# Altium PCB Hall.PcbDoc
Units mm, origin at the board's own origin, x right, y up, seen from the top; angles counter-clockwise.
Board outline 31.95 x 23.94 mm, 2 copper layers (Top Layer, Bottom Layer); 15 components, 8 nets, 36 pads, 49 vias.
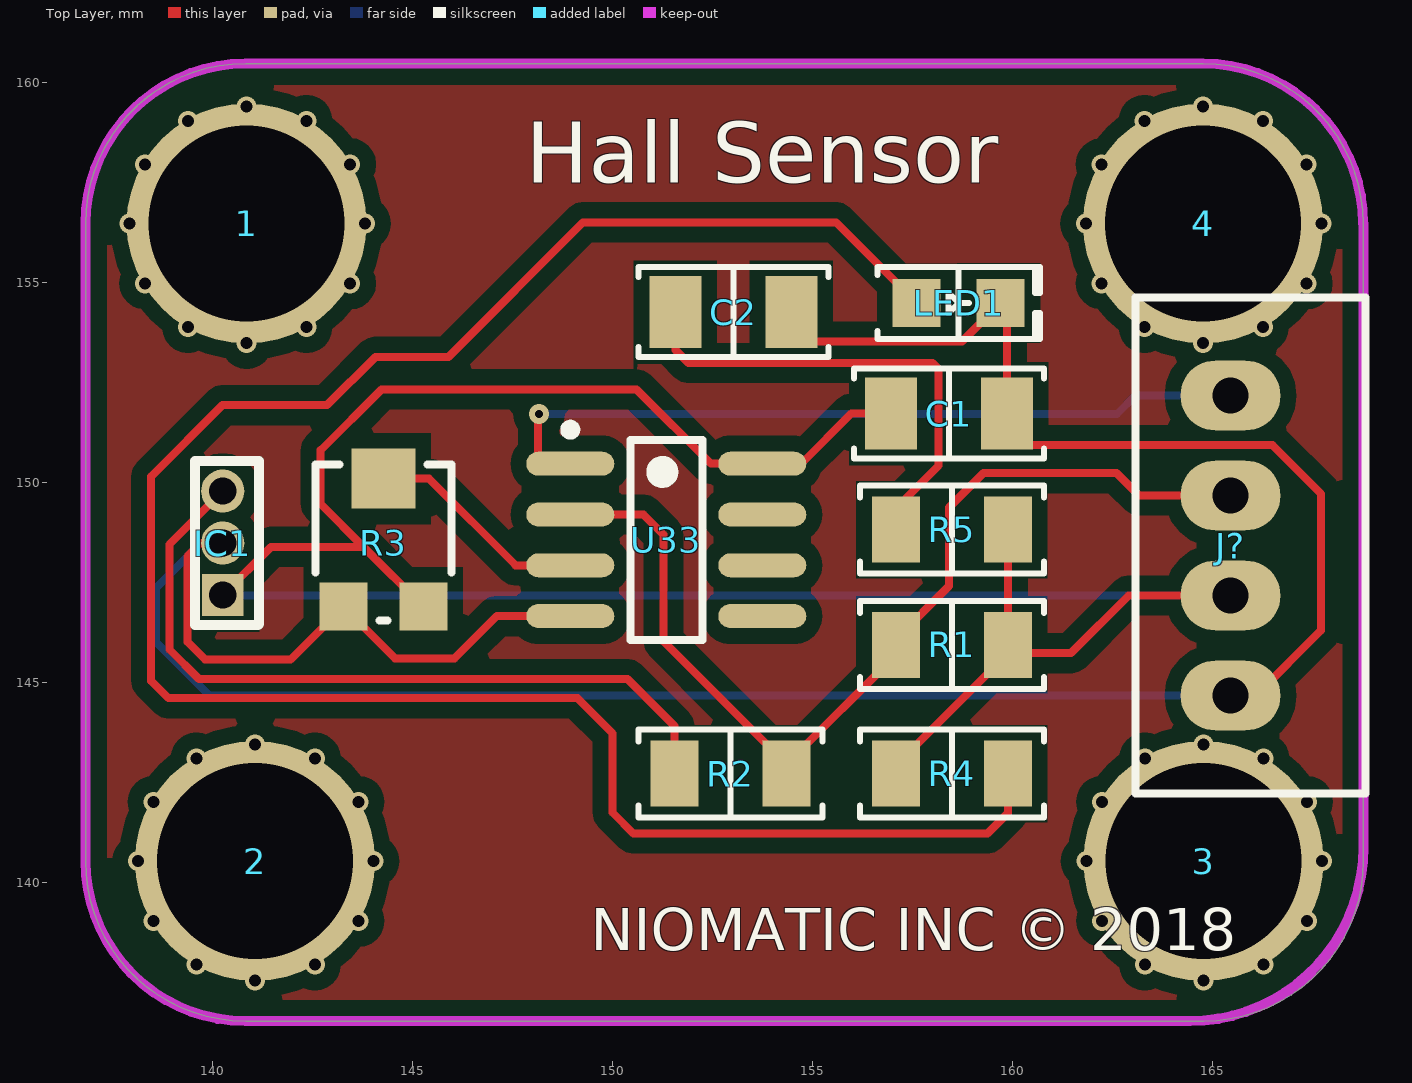
[diagram p0: Top Layer view]
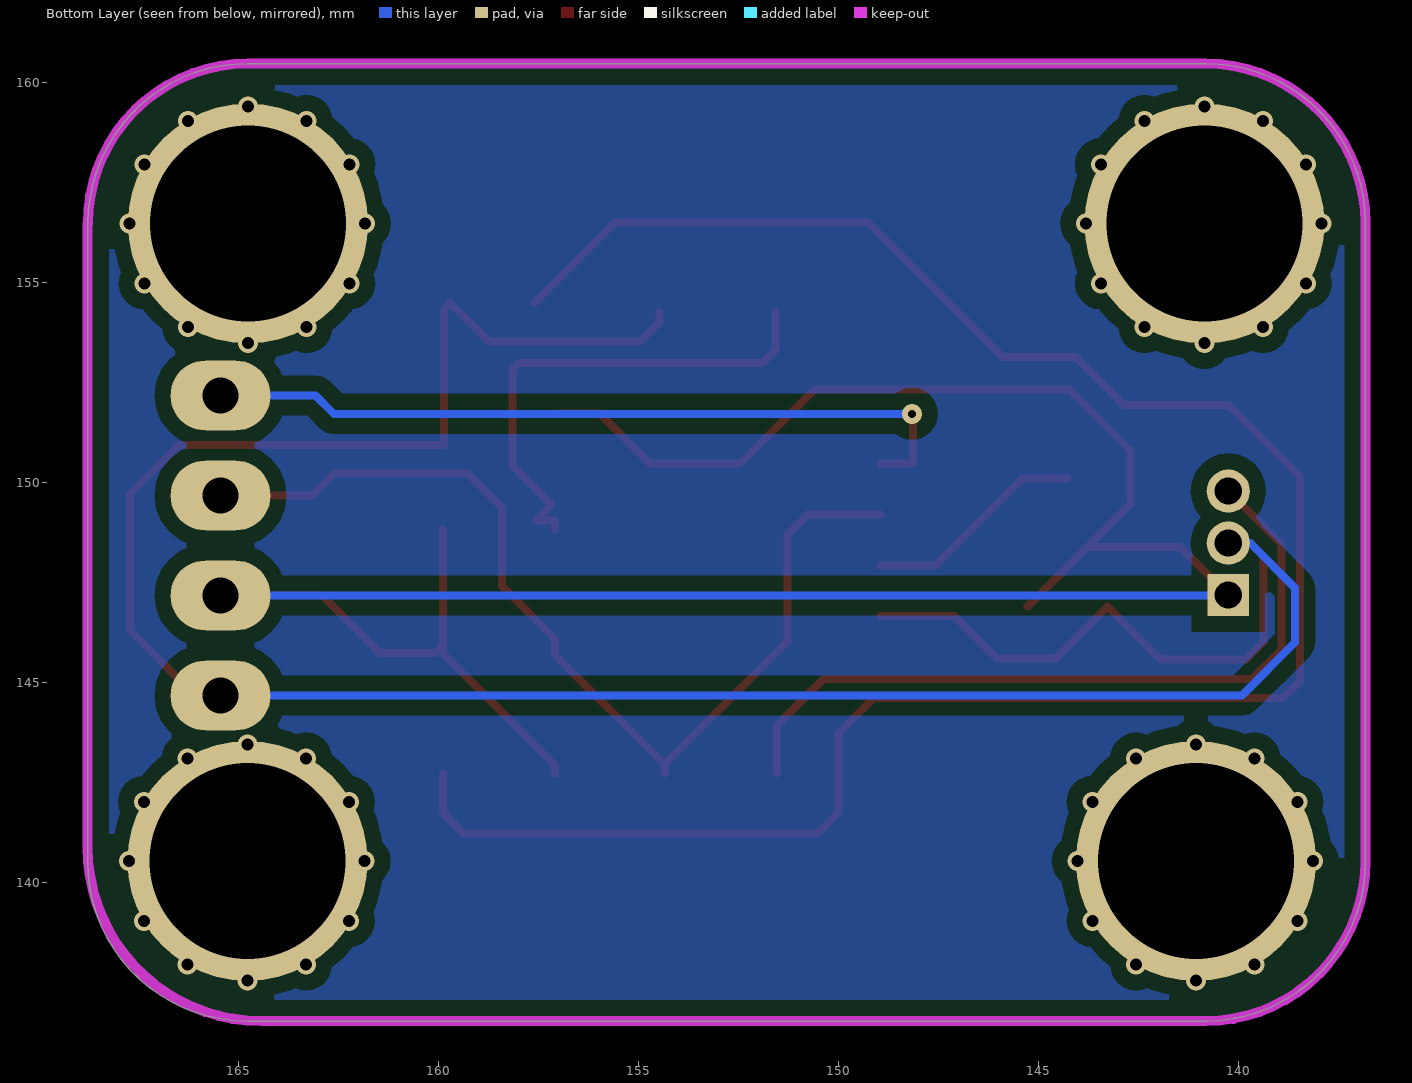
[diagram p1: Bottom Layer view, seen from below]
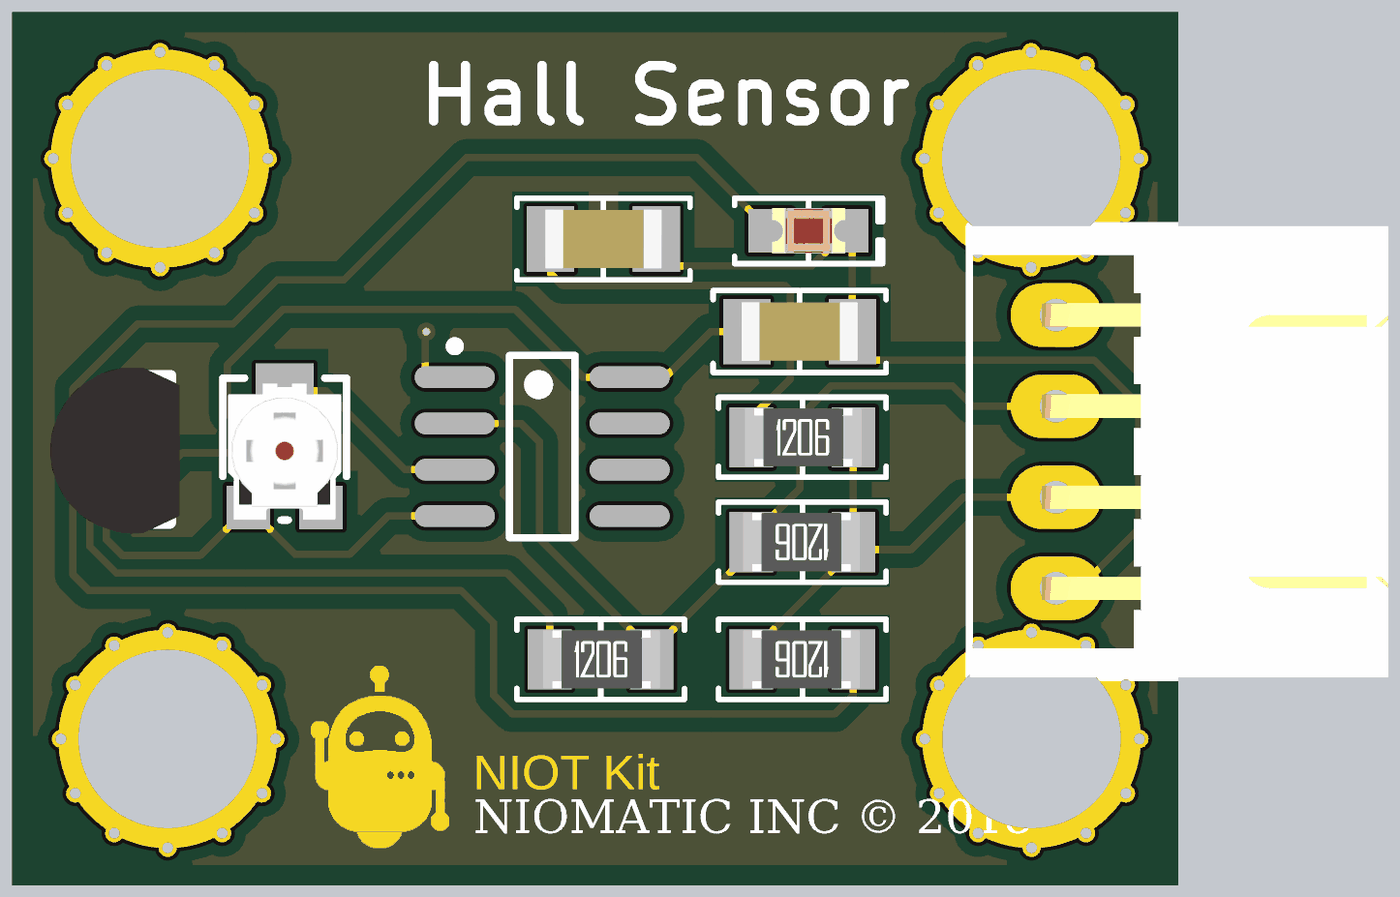
[diagram p2: 3D render of the assembled board from above, using the file's embedded part models]

## Layer stack, top to bottom
Top Solder: solder mask 0.0102, Solder Resist, Dk 3.5
Top Layer: signal copper 0.0356
Dielectric 1: dielectric 0.32, FR-4, Dk 4.8
Bottom Layer: signal copper 0.0356
Bottom Solder: solder mask 0.0102, Solder Resist, Dk 3.5

## Board outline
136.821,140.53 ccw(c140.821,140.53) 140.821,136.53 164.77,136.53 ccw(c164.77,140.53) 168.77,140.53 168.77,156.47 168.761,156.47 ccw(c164.761,156.47) 164.761,160.47 140.821,160.47 ccw(c140.821,156.47) 136.821,156.47 136.821,156.45

## Design rules (kind name [scope] priority, off if disabled: settings)
Clearance [All] p1: gap=0.4 ignorepadtopadclearanceinfootprint=FALSE
PolygonConnect [All] p1: connectstyle=Relief reliefconductorwidth=0.254 reliefentries=4 polygonreliefangle="90 Angle" airgapwidth=0.254
RoomDefinition Hall [InComponentClass('Hall')] p1: confinementstyle=ConfineIn formatcopy=TRUE lockcomponents=FALSE outline 178.943,26.924 198.247,26.924 198.247,44.577 178.943,44.577
RoutingVias [All] p1: holewidth=0.2 width=0.5 viastyle="Through Hole" minholewidth=0.2 minwidth=0.5 maxholewidth=0.2 maxwidth=0.5
SolderMaskExpansion [All] p1: expansion=0.102
Width [All] p1: maxlimit=0.2 minlimit=0.2 preferedwidth=0.2
30 further rules are at their usual default settings.

## Components (designator, comment, footprint, x,y, rotation, side; value= is the part's Value field where it differs from the comment)
1 "Lego" "Lego Hole" 140.85,156.47 r90 top
2 "Lego" "Lego Hole" 141.06,140.53 r90 top
3 "Lego" "Lego Hole" 164.771,140.53 r90 top
4 "Lego" "Lego Hole" 164.761,156.47 r90 top
C1 "100nF" "CAP 1206/3216" 158.405,151.719 r180 top value=0.1uF
C2 "100nF" "CAP 1206/3216" 153.02,154.258 r0 top value=0.1uF
IC1 "" SSe49 140.25,147.18 r90 top
J? "4 Pin" "JST XH B4B-XH-A - RIGHT" 165.445,148.42 r90 top
LED1 "RED" "LED 0805/2012 RED" 158.65,154.483 r0 top value=Green
R1 "100K" "RES 1206/3216" 158.48,145.936 r180 top value=1K
R2 "150R" "RES 1206/3216" 152.945,142.717 r0 top value=1K
R3 "10K" "POT Panasonic EVM" 144.27,148.44 r0 top value=10k
R4 "1K" "RES 1206/3216" 158.48,142.717 r180 top
R5 "10k" "RES 1206/3216" 158.48,148.815 r0 top value=1K
U33 "LM393M" M08A_N 151.34,148.56 r0 top

## Footprints (in the part's own frame and the unit in brackets; to place one, negate y for a bottom-side part, rotate by r counter-clockwise, add the part's x,y. Pads: shape width x height; smd on the part's side, far side on the other; paste and mask are expansions set on the pad)
"CAP 1206/3216" [mm] "Chip Capacitor, 2-Leads, Body 3.25x1.60mm, IPC Medium Density"
  rect 1.3x1.8 smd: 1(-1.45,0) 2(1.45,0)
  silkscreen extent -2.38,-1.12 2.37,1.12, body extent -1.6,-0.81 1.6,0.81, height 1.62
"JST XH B4B-XH-A - RIGHT" [mm]
  oval 1.75x2.5 hole 0.9: 1(-3.75,0) 2(-1.25,0) 3(1.25,0) 4(3.75,0)
  silkscreen extent -6.2,-3.38 6.2,2.38, body extent -6.2,-9.13 6.2,2.37, height 6.1
"LED 0805/2012 RED" [mm] "Chip Diode, 2-Leads, Body 2.00x1.25mm, IPC Medium Density"
  rect 1.2x1.2 smd: 1(-1.05,0) 2(1.05,0)
  silkscreen extent -2.03,-0.9 2.03,0.9, body extent -1,-0.62 1,0.63, height 0.9
"Lego Hole" [mm]
  round 6 hole 4.9: 0(0,0)
M08A_N [mm] "SOIC, 8-Leads, Body 4.9x3.9mm, Pitch 1.27mm, IPC Medium Density"
  oval 2.2x0.6 smd: 1(-2.4,1.905) 2(-2.4,0.635) 3(-2.4,-0.635) 4(-2.4,-1.905) 5(2.4,-1.905) 6(2.4,-0.635) 7(2.4,0.635) 8(2.4,1.905)
  silkscreen extent -2.52,-2.5 0.9,2.88, body extent -2,-2.5 2,2.5, height 1.75
"POT Panasonic EVM" [mm] "Panasonic EVM3Y 3.45mm x 3.10mm x 1.55mm"
  rect 1.2x1.2 smd: 1(-1,-1.55) 3(1,-1.55)
  rect 1.6x1.5 smd: 2(0,1.65)
  silkscreen extent -1.7,-1.9 1.7,2, body extent -1.55,-1.9 1.55,1.85, height 1.55
"RES 1206/3216" [mm] "Chip Resistor, 2-Leads, Body 3.13x1.55mm, IPC Medium Density"
  rect 1.2x1.65 smd: 1(-1.4,0) 2(1.4,0)
  silkscreen extent -2.3,-1.1 2.3,1.1, body extent -1.57,-0.8 1.62,0.8, height 0.6
SSe49 [mm]
  rect 1.046x1.046 / inner rect 1.524x1.524 / far side rect 1.046x1.046 hole 0.68: 1(0,0)
  round 1.08 / inner round 1.524 / far side round 1.08 hole 0.68: 2(1.3,0) 3(2.6,0)
  silkscreen extent -0.75,-0.91 3.35,0.69, body extent -1.02,-1.14 3.56,2.42, height 8.18

## Part data
C1 C2: library part Capacitor, "SMT Capacitor"
IC1: library part SS49E-T3, Manufacturer_Name=Honeywell, Package=TO130P160X410X300-3P, Allied_Number=70238630, DeviceSetName=SS49E-T3, GateName_1=G$1, Height=1.6mm, LibraryName=SS49E-T3, Manufacturer_Part_Number=SS49E-T3, RS_Part_Number=8749069, Supplier_Name=RS, SymbolName_1=SS49E-T3
LED1: library part LED, "Chip LED"
R1 R2 R4 R5: library part Resistor, "SMT Resistor"
R3: library part Potentiometer, "Potentiometer"
U33: "Low Power Low Offset Voltage Dual Comparator, 8-pin Narrow SOIC", Manufacturer="National Semiconductor", PackageTopMarking=NSZXTT*LM*393M, PowerWise=N, Code_IPC=SOIC127P600-8, Code_JEDEC=MS-012-AA, ComponentLink1Description="Manufacturer URL", ComponentLink1URL=http://www.national.com/, ComponentLink2Description="LM393 Datasheet", ComponentLink2URL=http://www.national.com/ds/LM/LM393.pdf, ComponentLink3Description="LM393 Web Page", ComponentLink3URL=http://www.national.com/pf/LM/LM393.html, ComponentLink4Description="M08A Package Page", ComponentLink4URL=http://www.national.com/packaging/folders/m08a.html, CompType=Amplifiers, DatasheetVersion=Aug-2002, High-Reliability=Y, PackageDescription="SOIC Narrow, 4.9 x 3.9 x 1.45mm, 8 Lead, 1.27mm Pitch", PackageReference=M08A, PackageVersion="revM, May-2009", PartNumber=LM393M, PinCount=8, RoHS=N

## Via types
v1: diameter 0.5, hole 0.3, Top Layer to Bottom Layer, 48 vias
v2: diameter 0.5, hole 0.2, Top Layer to Bottom Layer, tented both sides, 1 vias

## Nets (pads, with @x,y where several pads share a name; then routed paths per layer and width w, separated by ;. In a path a pad name is that pad's centre, name@x,y a point inside that pad or via, vN(x,y) a via of type N, cw(c..) or ccw(c..) an arc to the next point about the centre after c; other vN are vias at no path point)
AOUT: J?.3 R1.2 R2.2 U33.2 | length 25.5
  Top Layer w0.2: U33.2 150.765,149.195 151.27,148.69 151.27,146.026 R2.2@154.345,142.951 ; R2.2 R2.2@154.345,142.951 ; J?.3 163.156,149.67 162.596,150.23 159.27,150.23 158.41,149.37 158.41,147.405 157.08,146.075 R1.2 157.08,145.686 R2.2@154.345,142.951
DOUT: J?.4 U33.1 | length 19.5
  Top Layer w0.2: v2(148.158,151.714) 148.133,151.689 148.133,150.465 U33.1
  Bottom Layer w0.2: v2(148.158,151.714) 162.612,151.714 163.068,152.17 J?.4
GND: C1.1 C2.2 IC1.2 J?.1 LED1.2 R3.1 U33.4 | length 69.8
  Top Layer w0.2: IC1.2 139.7,148.48 139.37,148.15 139.37,146.013 139.812,145.57 141.95,145.57 R3.1 144.56,145.6 146.048,145.6 147.103,146.655 U33.4 ; C2.2 154.47,154 154.953,153.518 158.735,153.518 LED1.2 159.855,154.328 C1.1 159.855,150.927 166.497,150.927 167.71,149.714 167.71,146.3 166.08,144.67 J?.1
  Bottom Layer w0.2: IC1.2 139.7,148.48 138.58,147.36 138.58,146.002 139.912,144.67 J?.1
NetC2_1: C2.1 R5.1 | length 12.8
  Top Layer w0.2: C2.1 151.57,153.306 151.892,152.984 157.996,152.984 158.15,152.83 158.15,150.42 157.167,149.437 157.557,149.047 157.08,149.047 R5.1
NetIC1_3: IC1.3 R2.1 | length 19.1
  Top Layer w0.2: IC1.3 138.916,148.446 138.916,145.825 139.656,145.085 150.368,145.085 151.545,143.908 R2.1
NetLED1_1: LED1.1 R4.1 | length 53.1
  Top Layer w0.2: LED1.1 155.583,156.5 149.261,156.5 145.898,153.137 144.067,153.137 142.86,151.93 140.246,151.93 138.462,150.146 138.462,145.034 138.894,144.602 149.118,144.602 150,143.72 150,141.74 150.516,141.224 159.372,141.224 159.88,141.732 R4.1
NetR3_2: R3.2 U33.3 | length 5.6
  Top Layer w0.2: R3.2 145.409,150.09 147.574,147.925 U33.3
VCC: C1.2 IC1.1 J?.2 R1.1 R3.3 R4.2 R5.2 U33.8 | length 63.9
  Top Layer w0.2: IC1.1 141.457,148.387 143.773,148.387 ; R3.3 143.773,148.387 ; C1.2 155.965,151.719 154.711,150.465 U33.8 152.455,150.465 150.597,152.324 144.221,152.324 142.7,150.803 142.7,149.46 143.773,148.387 ; R4.2 157.08,142.926 159.88,145.726 R1.1 ; R5.2 R1.1 ; J?.2 162.9,147.17 161.46,145.73 160.086,145.73 R1.1
  Bottom Layer w0.2: IC1.1 140.26,147.17 J?.2
pads on no net: 1.0 2.0 3.0 4.0 U33.5 U33.6 U33.7
copper on no net:
  other v1: 141.06,137.541 164.771,137.541 139.594,137.941 142.555,137.941 163.305,137.941 166.266,137.941 138.522,139.036 143.649,139.036 162.233,139.036 167.36,139.036 138.13,140.53 144.02,140.53 161.841,140.53 167.731,140.53 138.522,142.011 143.649,142.011 162.233,142.011 167.36,142.011 139.594,143.094 142.555,143.094 163.305,143.094 166.266,143.094 141.06,143.451 164.771,143.451 140.85,153.481 164.761,153.481 139.384,153.881 142.344,153.881 163.295,153.881 166.255,153.881 138.312,154.976 143.439,154.976 162.223,154.976 167.35,154.976 137.92,156.47 143.81,156.47 161.831,156.47 167.721,156.47 138.312,157.951 143.439,157.951 162.223,157.951 167.35,157.951 139.384,159.034 142.344,159.034 163.295,159.034 166.255,159.034 140.85,159.391 164.761,159.391

## Polygon pours and split planes (outlines as drawn)
no net on Top Layer "Top Layer-No Net" (solid, pour order 0): 136.821,140.53 ccw(c140.821,140.53) 140.821,136.53 164.77,136.53 ccw(c164.77,140.53) 168.77,140.53 168.77,156.47 168.761,156.47 ccw(c164.761,156.47) 164.761,160.47 140.821,160.47 ccw(c140.821,156.47) 136.821,156.47 136.821,156.45
no net on Bottom Layer "Top Layer-No Net1" (solid, pour order 1): 136.821,140.53 ccw(c140.821,140.53) 140.821,136.53 164.77,136.53 ccw(c164.77,140.53) 168.77,140.53 168.77,156.47 168.761,156.47 ccw(c164.761,156.47) 164.761,160.47 140.821,160.47 ccw(c140.821,156.47) 136.821,156.47 136.821,156.45

## Keep-outs
Keep-Out Layer:
  lines w0.254: 136.821,140.51 136.821,156.45 ; 136.821,140.53 ccw(c140.821,140.53) 140.821,136.53 164.424,136.53 ccw(c164.424,140.876) 168.77,140.876 168.77,156.47 ; 136.821,156.47 cw(c140.821,156.47) 140.821,160.47 164.761,160.47 cw(c164.761,156.47) 168.761,156.47

## Silkscreen, mask and mechanical layers (free items; w line width, h text height)
Top Overlay:
  text "Hall Sensor" at 147.83,157.49 h1.52
  text "NIOMATIC INC © 2018" at 149.45,137.95 h1.8
Top Solder:
  drawing of 381 lines, arcs and shapes, not listed
  text "NIOT Kit" at 149.44,139.15 h1.52